# Altium PCB g_l.PcbDoc
Units mm, origin at the board's own origin, x right, y up, seen from the top; angles counter-clockwise.
Board outline 25.4 x 25.4 mm, 2 copper layers (Top Layer, Bottom Layer); 29 components, 18 nets, 63 pads, 14 vias.
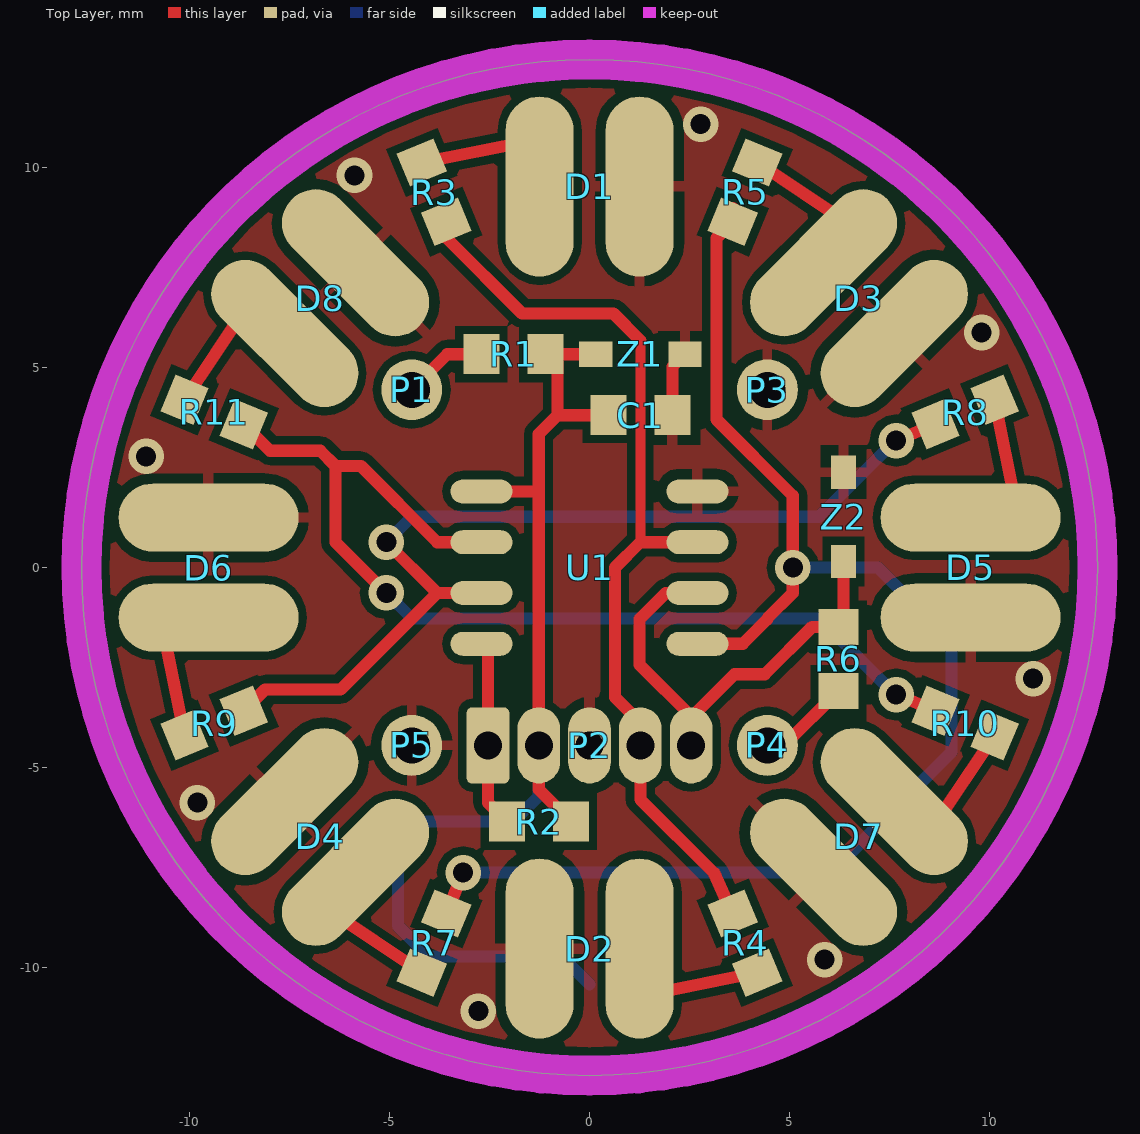
[diagram p0: Top Layer view]
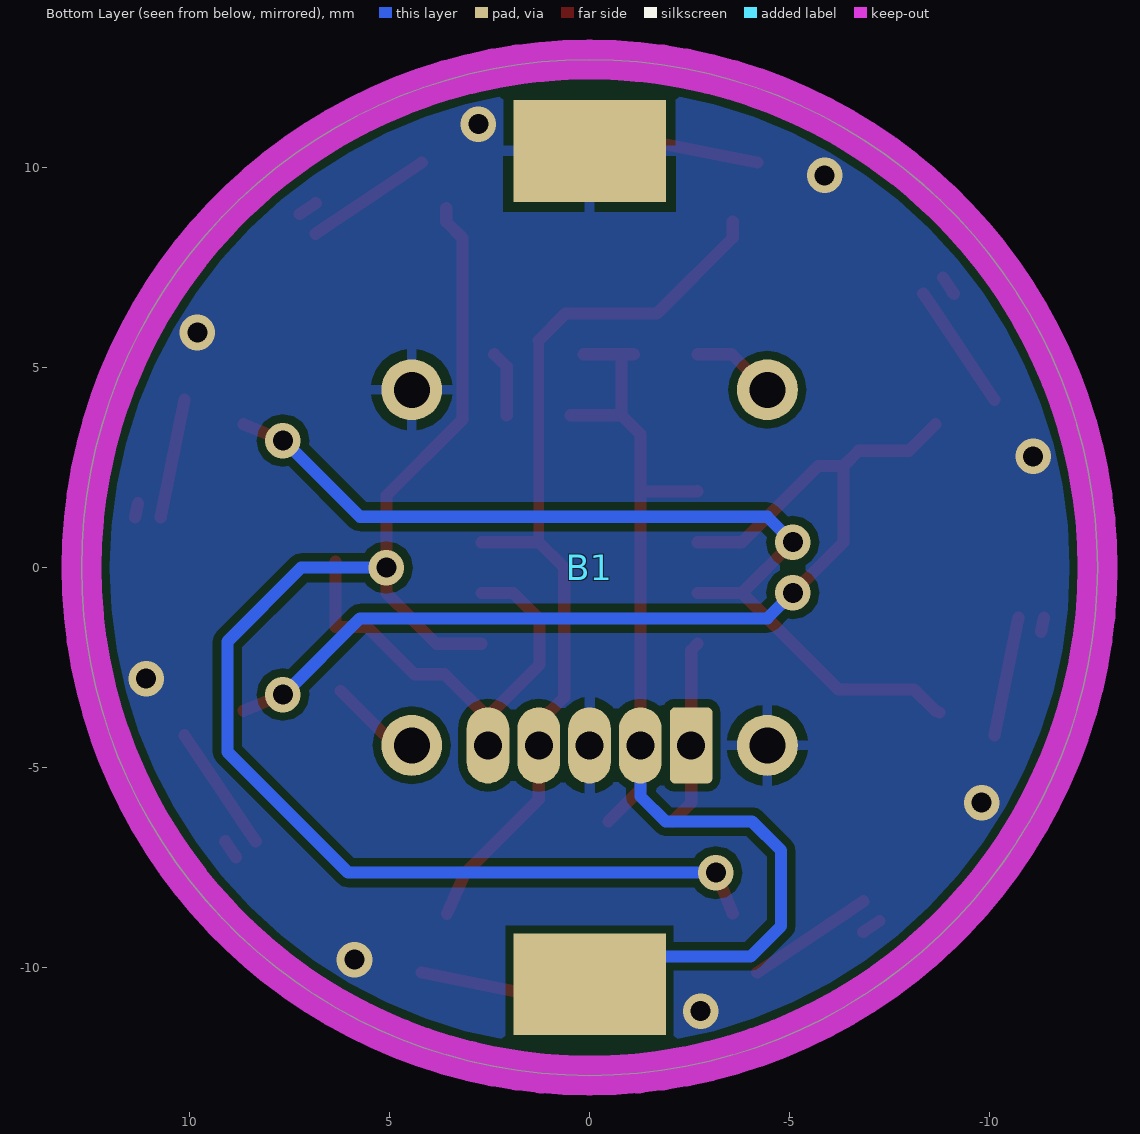
[diagram p1: Bottom Layer view, seen from below]

## Layer stack, top to bottom
Top Solder: solder mask 0.0102, Solder Resist, Dk 3.5
Top Layer: signal copper 0.0356
Dielectric 1: dielectric 0.32, FR-4, Dk 4.8
Bottom Layer: signal copper 0.0356
Bottom Solder: solder mask 0.0102, Solder Resist, Dk 3.5

## Board outline
0,-12.7 cw(c0,0) -12.7,0 cw(c0,0) 0,12.7 cw(c0,0) 12.7,0 cw(c0,0)

## Design rules (kind name [scope] priority, off if disabled: settings)
Clearance [All] p1: gap=0.203
ComponentClearance [All] p1: gap=0.127 collisioncheckmode=3 verticalgap=0.254 showdistances=FALSE
MinimumAnnularRing MinimumAnnularRing_via [IsVia] p1: minimumring=0.127
MinimumAnnularRing [All] p2: minimumring=0.178
MinimumSolderMaskSliver [All] p1: minsoldermaskwidth=0.102
PolygonConnect PolygonConnect_Via [All vs IsVia] p1: connectstyle=Direct reliefconductorwidth=0.254 reliefentries=4 polygonreliefangle="90 Angle" airgapwidth=0.254
PolygonConnect [All] p2: connectstyle=Relief reliefconductorwidth=0.254 reliefentries=4 polygonreliefangle="90 Angle" airgapwidth=0.254
RoutingVias [All] p1: holewidth=0.711 width=1.27 viastyle="Through Hole" minholewidth=0.711 minwidth=1.27 maxholewidth=0.711 maxwidth=1.27
SolderMaskExpansion [All] p1: expansion=0.076
Width [All] p1: maxlimit=1.27 minlimit=0.254 preferedwidth=0.508
27 further rules are at their usual default settings.

## Components (designator, comment, footprint, x,y, rotation, side; value= is the part's Value field where it differs from the comment)
B1 "BR1225" "BHSD 1225 SM" 0,0 r90 bottom
C1 "100nF" CAPC0603(1608)100_N 1.27,3.81 r180 top
D1 "Side View" "LED Side Minimum" 0,9.525 r180 top
D2 "Side View" "LED Side Minimum" 0,-9.525 r0 top
D3 "Side View" "LED Side Minimum" 6.735,6.735 r135 top
D4 "Side View" "LED Side Minimum" -6.735,-6.735 r315 top
D5 "Side View" "LED Side Minimum" 9.525,0 r90 top
D6 "Side View" "LED Side Minimum" -9.525,0 r270 top
D7 "Side View" "LED Side Minimum" 6.735,-6.735 r45 top
D8 "Side View" "LED Side Minimum" -6.735,6.735 r225 top
P1 "HOLE35-70-22GA" HOLE35-70-22GA -4.445,4.445 r0 top
P2 "Program Header" ProgHeader 0,-4.445 r0 top
P3 "HOLE35-70-22GA" HOLE35-70-22GA 4.445,4.445 r0 top
P4 "HOLE35-70-22GA" HOLE35-70-22GA 4.445,-4.445 r0 top
P5 "HOLE35-70-22GA" HOLE35-70-22GA -4.445,-4.445 r0 top
R1 "10R" RESC0603(1608)_N -1.905,5.334 r0 top
R2 "10K" RESC0603(1608)_N -1.27,-6.35 r180 top
R3 "100R" RESC0603(1608)_N -3.888,9.387 r112.5 top
R4 "100R" RESC0603(1608)_N 3.888,-9.387 r292.5 top
R5 "100R" RESC0603(1608)_N 3.888,9.387 r67.5 top
R6 "100R" RESC0603(1608)_N 6.223,-2.286 r90 top
R7 "100R" RESC0603(1608)_N -3.888,-9.387 r247.5 top
R8 "100R" RESC0603(1608)_N 9.387,3.888 r22.5 top
R9 "100R" RESC0603(1608)_N -9.387,-3.888 r202.5 top
R10 "100R" RESC0603(1608)_N 9.387,-3.888 r337.5 top
R11 "100R" RESC0603(1608)_N -9.387,3.888 r157.5 top
U1 "PIC12F1501 SOIC" "MICROCHIP SOIC 8 Narrow" 0,0 r0 top
Z1 "5v1" MM3Z 1.27,5.334 r0 top
Z2 "5v1" MM3Z 6.35,1.27 r90 top

## Footprints (in the part's own frame and the unit in brackets; to place one, negate y for a bottom-side part, rotate by r counter-clockwise, add the part's x,y. Pads: shape width x height; smd on the part's side, far side on the other; paste and mask are expansions set on the pad)
"BHSD 1225 SM" [mm] "BHSD 1225 Battery Holder"
  rect 2.54x3.81 smd: 1(-10.415,0) 2(10.415,0)
  body extent -9.25,-7.5 9.25,7.5, height 5
CAPC0603(1608)100_N [mm] "Chip Capacitor, Body 1.6x0.8mm, Height 1.0mm, IPC Medium Density"
  rect 0.9x1 smd: 1(-0.8,0) 2(0.8,0)
  body extent -0.87,-0.48 0.88,0.47, height 1
HOLE35-70-22GA [mil]
  round 60 hole 35.43: 1(0,0)
"LED Side Minimum" [mm] "LED Side"
  rrect100% 1.7x4.5 smd mask+0.076: 1(-1.25,0) 2(1.25,0)
  body extent -2,-1.81 2,1.8, height 4
"MICROCHIP SOIC 8 Narrow" [mm] "Microchip SOIC 8 Narrow"
  oval 1.55x0.6 smd: 1(-2.7,1.905) 2(-2.7,0.635) 3(-2.7,-0.635) 4(-2.7,-1.905) 5(2.7,-1.905) 6(2.7,-0.635) 7(2.7,0.635) 8(2.7,1.905)
  body extent -1.95,-2.45 1.95,2.45, height 1.75
MM3Z [mm] "TSOP, 2-Leads, Body 1.25x1.70mm, Pitch 1.27mm, IPC Medium Density"
  rect 0.83x0.63 smd: 1(-1.115,0) 2(1.115,0)
  body extent -0.9,-0.7 0.9,0.7, height 1.1
ProgHeader [mm] "Programming Header, 5 Position"
  rrect25% 1.067x1.905 hole 0.7: 1(-2.54,0)
  oval 1.067x1.905 hole 0.7: 2(-1.27,0) 3(0,0) 4(1.27,0) 5(2.54,0)
  body extent -3.54,-1 3.54,1, height 1.27
RESC0603(1608)_N [mm] "Chip Resistor, Body 1.6x0.8mm, IPC Medium Density"
  rect 0.9x1 smd: 1(-0.8,0) 2(0.8,0)
  body extent -0.85,-0.47 0.85,0.47, height 0.6

## Part data
B1: library part "BHSD 1225 SM", "BHSD 1225 Battery Holder"
C1: library part CMP-1035-02592-1, "CAP 100nF 50V ±10% 0603 (1608 Metric) Thickness 1mm SMD"
D1 D2 D3 D4 D5 D6 D7 D8: library part "LED_Side View", "LED Side View"
P2: library part ProgHeader, "Programming header"
R1: library part CMP-1012-00284-1, "10R 0.1W 1% 0603 (1608 Metric)  SMD"
R2: library part CMP-1012-00623-1, "10K 0.1W 1% 0603 (1608 Metric)  SMD"
R3 R4 R5 R6 R7 R8 R9 R10 R11: library part CMP-1012-00397-1, "100R 0.1W 1% 0603 (1608 Metric)  SMD"
Z1 Z2: library part MM3Z5V1, "Zener Diode, SOD323, 5.1v, 200 mW"

## Via types
v1: diameter 0.889, hole 0.5, Top Layer to Bottom Layer, 14 vias

## Nets (pads, with @x,y where several pads share a name; then routed paths per layer and width w, separated by ;. In a path a pad name is that pad's centre, name@x,y a point inside that pad or via, vN(x,y) a via of type N, cw(c..) or ccw(c..) an arc to the next point about the centre after c; other vN are vias at no path point)
CLK: P2.5 R6.2 U1.6 Z2.1 | length 12.4
  Top Layer w0.305: P2.5@2.54,-5.08 P2.5@2.54,-3.75 ; U1.6 1.905,-0.635 1.25,-1.29 1.25,-2.429 2.54,-3.719 P2.5@2.54,-3.75 ; Z2.1 6.35,-1.486 R6.2 5.561,-1.486 4.38,-2.667 3.623,-2.667 P2.5@2.54,-3.75
DAT: P2.4 R3.1 R4.1 U1.7 | length 23.5
  Top Layer w0.254: 1.27,0.635 1.27,5.679
  Top Layer w0.305: R3.1 -3.582,8.245 -1.687,6.35 0.599,6.35 1.27,5.679 ; U1.7 1.27,0.635 0.635,0 0.635,-3.24 1.27,-3.875 1.27,-5.799 3.115,-7.645 R4.1@3.566,-8.655
GND: B1.2 C1.1 D1.1 D2.1 D3.1 D4.1 D5.1 D6.1 D7.1 D8.1 P2.3 P3.1 P5.1 U1.8 Z1.2 Z2.2 | length 1.7
  Top Layer w0.305: C1.1 2.07,5.019 Z1.2
  other v1: -2.777,-11.087 5.876,-9.804 -9.804,-5.876 11.087,-2.777 -11.087,2.777 9.804,5.876 -5.876,9.804 2.777,11.087
NetD1_2: D1.2 R3.2 | length 3.6
  Top Layer w0.305: R3.2 -1.474,10.661 D1.2@-1.058,10.743 ; D1.2@-1.609,11.288 -1.485,11.314 D1.2@-1.25,11.361
NetD2_2: D2.2 R4.2 | length 3
  Top Layer w0.305: D2.2@1.25,-10.722 1.483,-10.675 R4.2
NetD3_2: D3.2 R5.2 | length 3.7
  Top Layer w0.305: R5.2 6.497,8.581 D3.2@6.848,8.345 ; D3.2@6.844,9.107 6.947,9.038 D3.2@7.251,8.836
NetD4_2: D4.2 R7.2 | length 3.7
  Top Layer w0.305: D4.2@-7.251,-8.836 -6.947,-9.038 D4.2@-6.844,-9.107 ; D4.2@-6.848,-8.345 -6.497,-8.581 R7.2
NetD5_2: D5.2 R8.2 | length 3.4
  Top Layer w0.305: R8.2 10.675,1.483 D5.2@10.722,1.25 ; D5.2@11.288,1.609 11.314,1.485 D5.2@11.361,1.25
NetD6_2: D6.2 R9.2 | length 3.4
  Top Layer w0.305: D6.2@-11.361,-1.25 -11.314,-1.485 D6.2@-11.288,-1.609 ; D6.2@-10.722,-1.25 -10.675,-1.483 R9.2
NetD7_2: D7.2 R10.2 | length 3.7
  Top Layer w0.305: D7.2@8.345,-6.848 8.581,-6.497 R10.2 ; D7.2@8.836,-7.251 9.038,-6.947 D7.2@9.107,-6.844
NetD8_2: D8.2 R11.2 | length 3.7
  Top Layer w0.305: R11.2 -8.581,6.497 D8.2@-8.345,6.848 ; D8.2@-9.107,6.844 -9.038,6.947 D8.2@-8.836,7.251
NetP1_1: P1.1 R1.1 | length 2.1
  Top Layer w0.305: P1.1 -3.556,5.334 R1.1
NetP4_1: P4.1 R6.1 | length 2.3
  Top Layer w0.305: P4.1 4.864,-4.445 R6.1
NetR5_1: R5.1 R7.1 U1.5 | length 35.6
  Top Layer w0.305: R7.1 v1(-3.159,-7.627) ; U1.5 3.83,-1.905 4.445,-1.29 4.445,-1.27 5.08,-0.635 v1(5.08,0) 5.08,1.795 3.175,3.7 3.175,8.241 R5.1 R5.1@3.582,8.991
  Bottom Layer w0.305: v1(-3.159,-7.627) 6.039,-7.627 9.052,-4.614 9.052,-1.846 7.206,0 v1(5.08,0)
NetR8_1: R8.1 R9.1 U1.3 | length 23.9
  Top Layer w0.305: R9.1@-8.74,-3.62 R9.1 -8.114,-3.048 -6.223,-3.048 -3.81,-0.635 ; v1(-5.08,0.635) -3.81,-0.635 ; U1.3 -3.81,-0.635 ; v1(7.665,3.175) R8.1
  Bottom Layer w0.305: v1(-5.08,0.635) -4.445,1.27 5.738,1.27 v1@7.627,3.159 ; v1@7.638,3.148 v1(7.665,3.175)
NetR10_1: R10.1 R11.1 U1.2 | length 25.7
  Top Layer w0.305: R11.1 -7.987,2.921 -6.731,2.921 -6.35,2.54 ; v1(-5.08,-0.635) -6.35,0.635 -6.35,2.54 ; U1.2 -3.81,0.635 -5.715,2.54 -6.35,2.54 ; v1(7.665,-3.175) R10.1
  Bottom Layer w0.305: v1(-5.08,-0.635) -4.445,-1.27 5.738,-1.27 v1@7.627,-3.159 ; v1@7.638,-3.148 v1(7.665,-3.175)
VDD: B1.1 C1.2 P2.2 R1.2 R2.1 U1.1 Z1.1 | length 28.7
  Top Layer w0.305: U1.1@-2.7,1.91 U1.1 -1.27,1.905 ; R1.2 R1.2@-0.8,5.334 ; R2.1 -1.27,-5.55 -1.27,1.905 ; Z1.1 R1.2@-0.8,5.334 ; C1.2 -0.8,3.81 ; -1.27,1.905 -1.27,3.34 -0.8,3.81 ; -0.8,3.81 R1.2@-0.8,5.334
  Bottom Layer w0.305: P2.2@-1.27,-4.572 -1.27,-5.715 -1.905,-6.35 -4.064,-6.35 -4.789,-7.075 -4.789,-8.96 -4.027,-9.723 -0.692,-9.723 B1.1
VPP: P2.1 R2.2 U1.4 | length 4.7
  Top Layer w0.305: U1.4 -2.54,-2.065 -2.54,-5.88 R2.2

## Polygon pours and split planes (outlines as drawn)
GND on Top Layer "GND" (solid, remove dead copper, pour order 4): -15.875,-15.875 15.875,-15.875 15.875,15.875 -15.875,15.875
GND on Bottom Layer "GND" (solid, remove dead copper, pour order 3): -15.875,-15.875 15.875,-15.875 15.875,15.875 -15.875,15.875

## Keep-outs
Keep-Out Layer:
  the board outline again, w1

## Silkscreen, mask and mechanical layers (free items; w line width, h text height)
Top Solder:
  rectangle: -2.54,-5.445 2.54,-3.445
  lines w0.5: -3.645,-8.8 -3.159,-7.627 ; 7.665,-3.175 8.8,-3.645 ; 7.665,3.175 8.8,3.645
Bottom Solder:
  text "+" at -1.307,-13.271 h0.8
  text "+" at 1.307,-13.271 h0.8
Drill Drawing:
  circle w0.15: c0,0 r12.7